# Altium PCB Single Channel Isolated Gate Driver Test Board Rev 2.PcbDoc
Units mm, origin at the board's own origin, x right, y up, seen from the top; angles counter-clockwise.
Board outline 58 x 46 mm, 4 copper layers (Top Layer, Power Layer, Ground Layer, Bottom Layer), stack 1.57 mm thick; 39 components, 17 nets, 84 pads, 15 vias.
Unrouted connection lines stored in the file: 2.
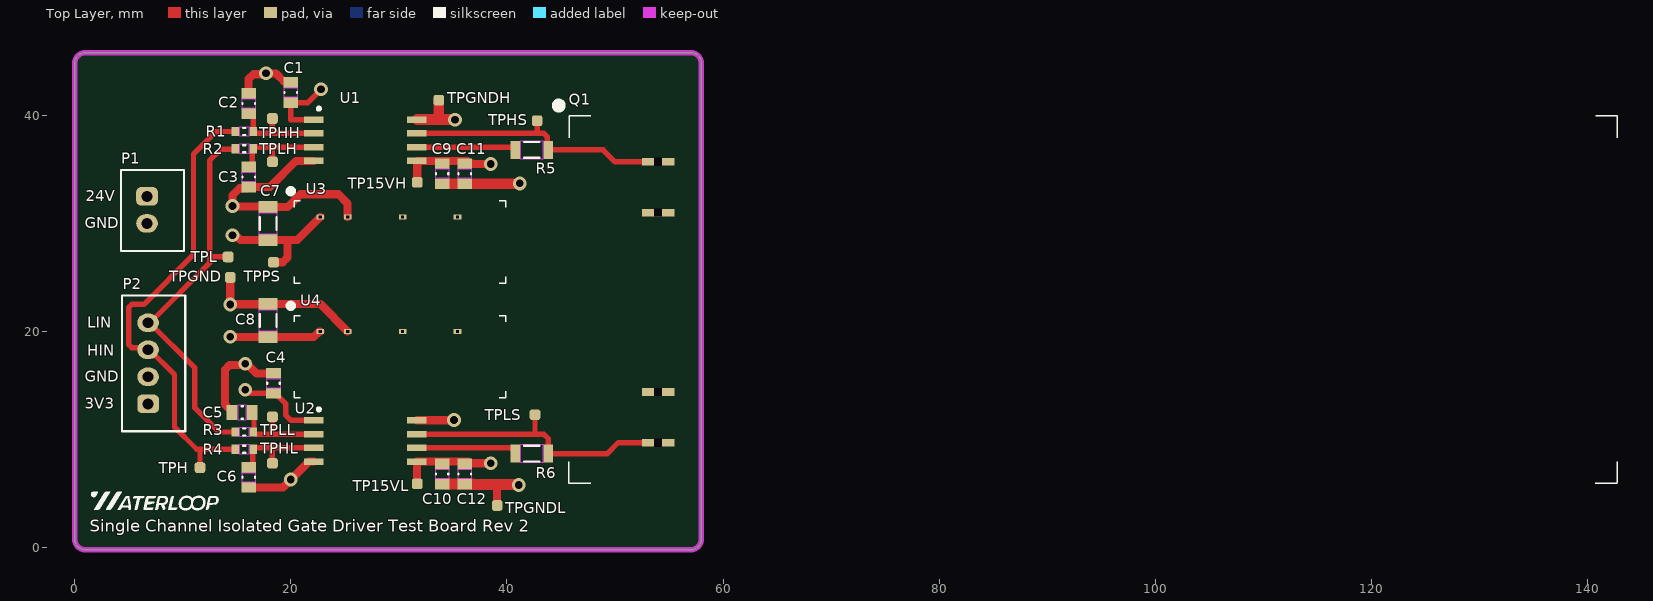
[diagram p0: Top Layer view]
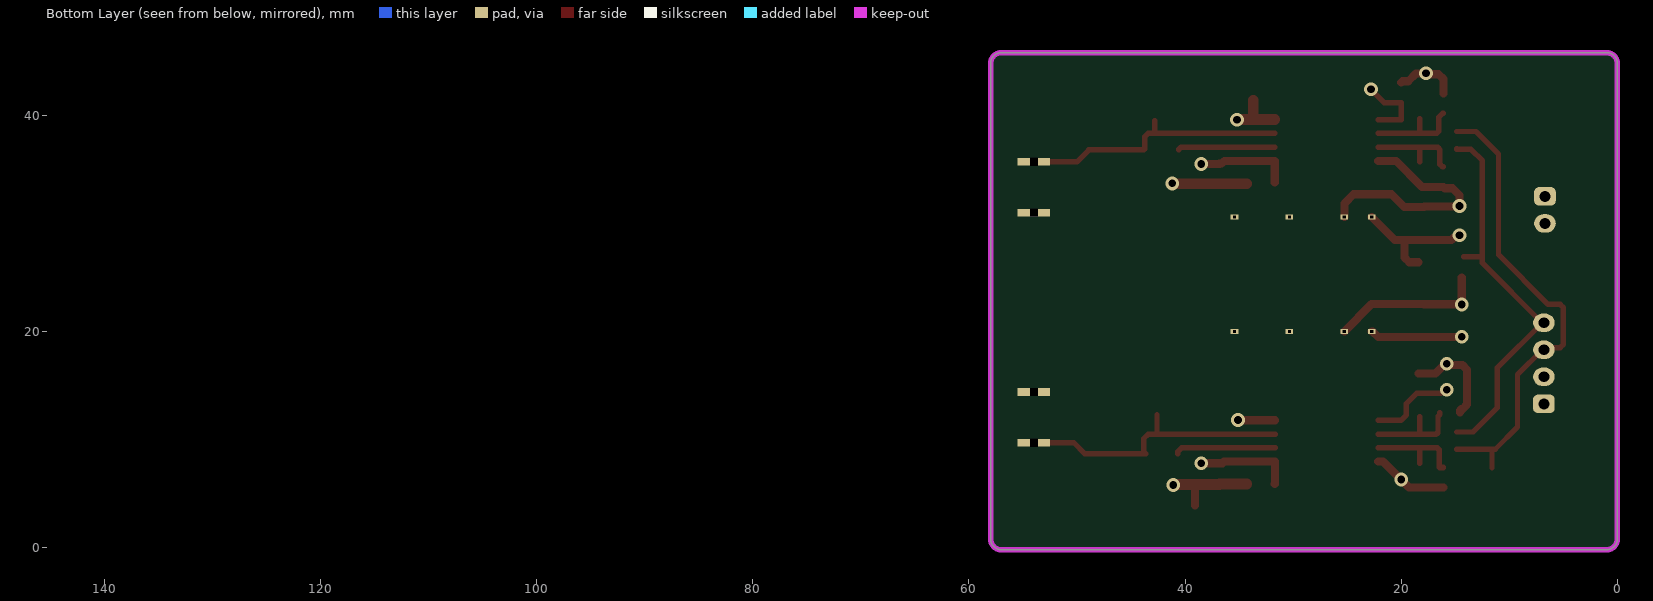
[diagram p1: Bottom Layer view, seen from below]
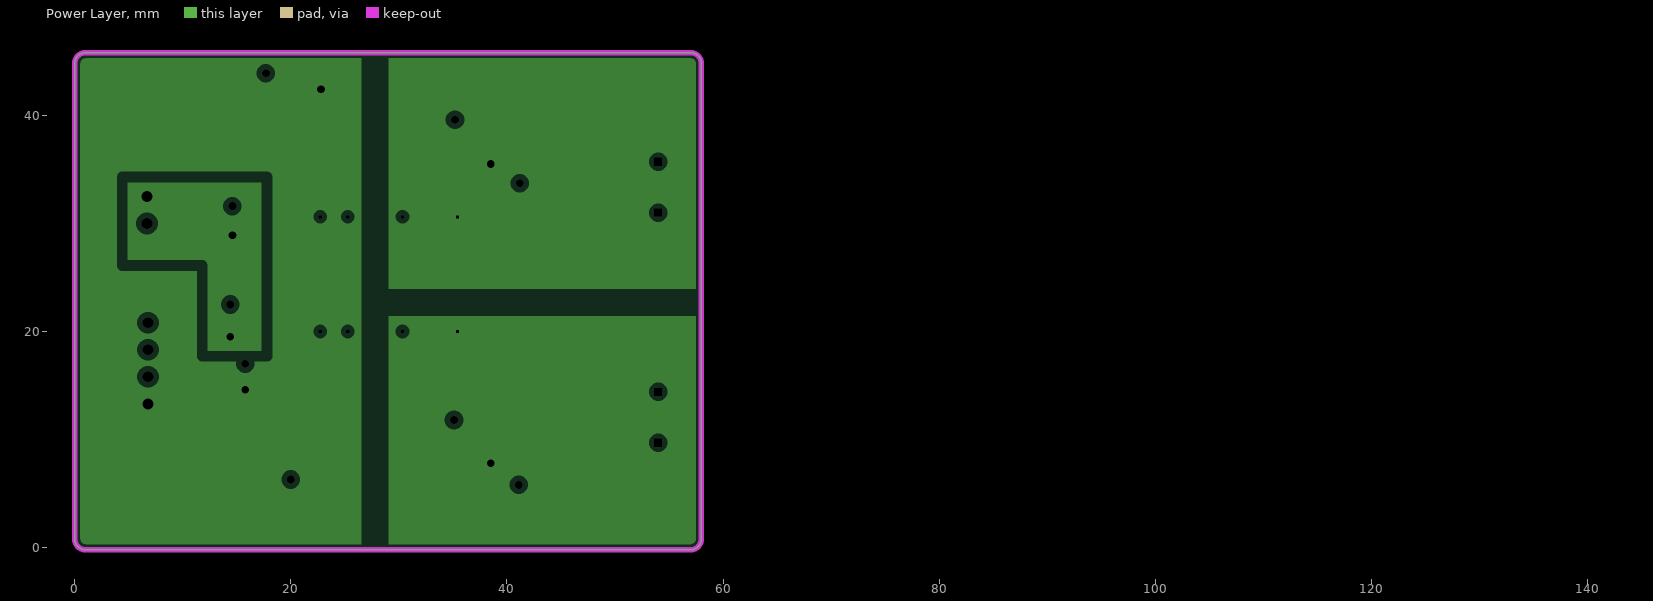
[diagram p2: Power Layer, clearances drawn from the general rule]
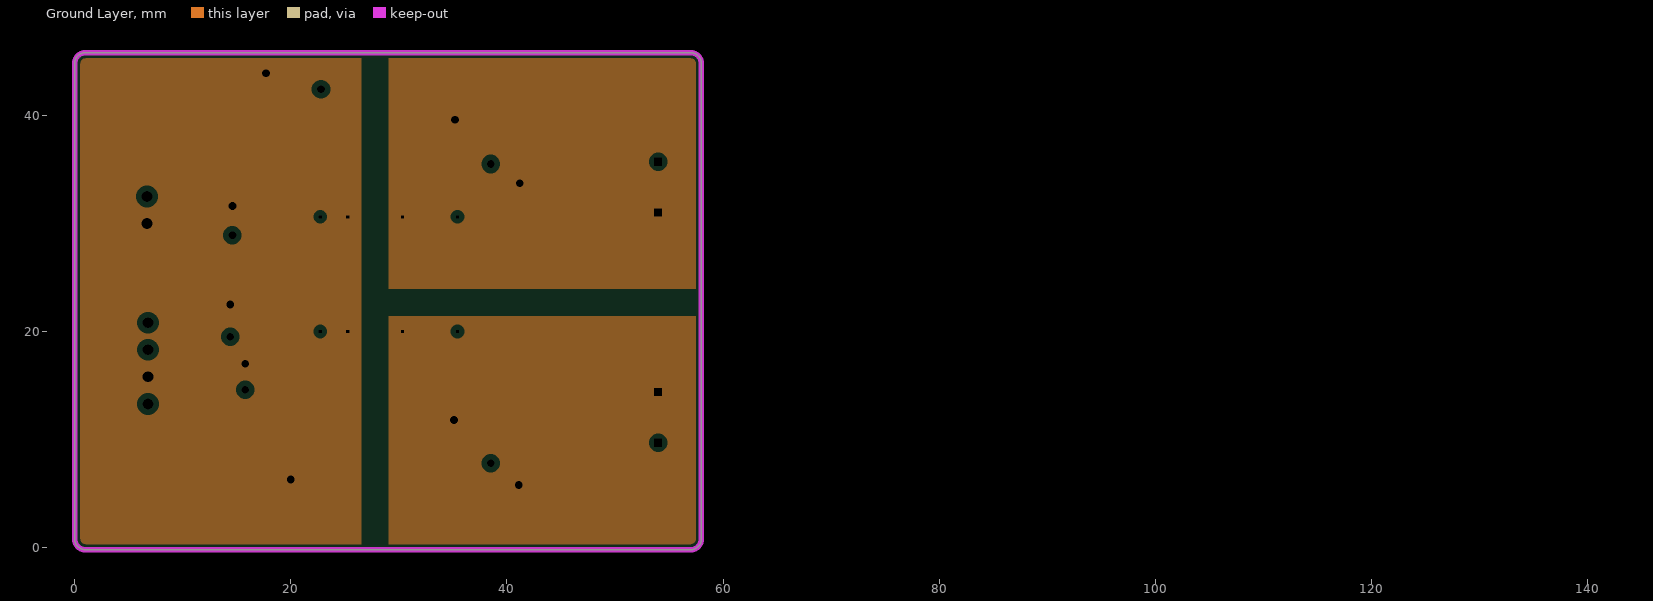
[diagram p3: Ground Layer, clearances drawn from the general rule]
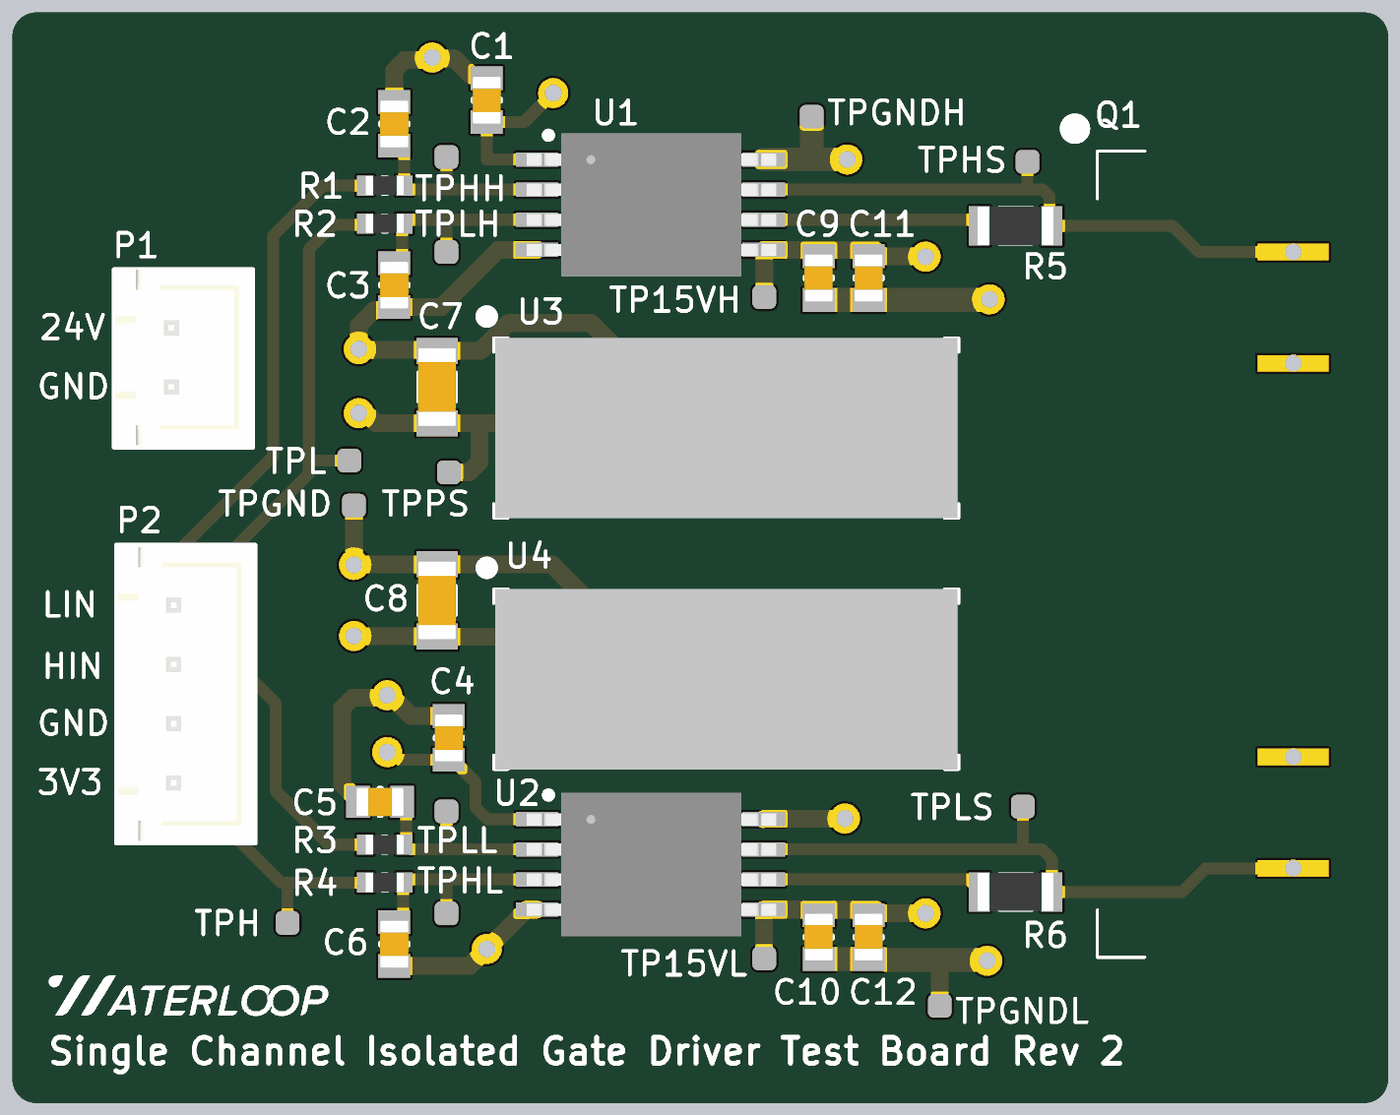
[diagram p4: 3D render of the assembled board from above, using the file's embedded part models]

## Layer stack, top to bottom
Top Solder: solder mask 0.0102, Solder Resist, Dk 3.5
Top Layer: signal copper 0.035
Dielectric 2: prepreg 0.2, FR-4, Dk 4.6
Power Layer: plane copper 0.0175, net (Multiple Nets)
Dielectric 1: dielectric 1.065, FR-4, Dk 4.6
Ground Layer: plane copper 0.0175, net (Multiple Nets)
Dielectric 3: prepreg 0.2, FR-4, Dk 4.6
Bottom Layer: signal copper 0.035
Bottom Solder: solder mask 0.0102, Solder Resist, Dk 3.5

## Board outline
0,0.8 0,44.8 cw(c1,44.8) 1,45.8 57,45.8 cw(c57,44.8) 58,44.8 58,0.8 cw(c57,0.8) 57,-0.2 1,-0.2 cw(c1,0.8)

## Design rules (kind name [scope] priority, off if disabled: settings)
Clearance [All] p1: gap=0.254 ignorepadtopadclearanceinfootprint=FALSE except(0: Arc-Hole Track-Hole SMDPad-Hole THPad-Hole Via-Hole Fill-Hole Poly-Hole Region-Hole Text-Hole)
PlaneClearance [All] p1: clearance=0.508
PlaneConnect [All] p1: planeconnectstyle=Relief reliefexpansion=0.508 reliefentries=4 reliefconductorwidth=0.254 reliefairgap=0.254
PolygonConnect [All] p1: connectstyle=Direct reliefconductorwidth=0.254 reliefentries=4 polygonreliefangle="90 Angle" airgapwidth=0.254
RoutingVias [All] p1: holewidth=0.711 width=1.27 viastyle="Through Hole" minholewidth=0.711 minwidth=1.27 maxholewidth=0.711 maxwidth=1.27
SolderMaskExpansion [All] p1: expansion=0.102 istentingtop=FALSE
Width [All] p1: maxlimit=2.54 minlimit=0.254 preferedwidth=0.508 minimp=50.000000 maximp=50.000000 favimp=50.000000
28 further rules are at their usual default settings.

## Components (designator, comment, footprint, x,y, rotation, side; value= is the part's Value field where it differs from the comment)
C1 "Capacitor - Nonpolarized" "0805 - Capacitor" 20,42.1 r90 top value="100 nF"
C2 "Capacitor - Nonpolarized" "0805 - Capacitor" 16.1,41.1 r270 top value="100 pF"
C3 "Capacitor - Nonpolarized" "0805 - Capacitor" 16.1,34.3 r90 top value="100 pF"
C4 "Capacitor - Nonpolarized" "0805 - Capacitor" 18.4,15.2 r90 top value="100 nF"
C5 "Capacitor - Nonpolarized" "0805 - Capacitor" 15.5,12.5 r0 top value="100 pF"
C6 "Capacitor - Nonpolarized" "0805 - Capacitor" 16.1,6.5 r90 top value="100 pF"
C7 "Capacitor - Nonpolarized" "1206 - Capacitor" 17.9,30 r270 top value="22 uF"
C8 "Capacitor - Nonpolarized" "1206 - Capacitor" 17.9,21 r270 top value="22 uF"
C9 "Capacitor - Nonpolarized" "0805 - Capacitor" 34,34.6 r90 top value="100 nF"
C10 "Capacitor - Nonpolarized" "0805 - Capacitor" 34,6.8 r90 top value="100 nF"
C11 "Capacitor - Nonpolarized" "0805 - Capacitor" 36.1,34.6 r90 top value="1 uF"
C12 "Capacitor - Nonpolarized" "0805 - Capacitor" 36.1,6.8 r90 top value="1 uF"
P1 "1x2 Header" B2B-XH 6.7,30 r90 top
P2 "1x4 Header" B4B-XH 6.8,13.3 r90 top
Q1 "FF50R12RT4" FF50R12RT4 47,5.7 r0 top
R1 "Resistor" "0603 - Resistor" 15.7,38.5 r0 top value=470
R2 "Resistor" "0603 - Resistor" 15.7,36.9 r0 top value=470
R3 "Resistor" "0603 - Resistor" 15.7,10.7 r0 top value=470
R4 "Resistor" "0603 - Resistor" 15.7,9.1 r0 top value=470
R5 "Resistor" "1206 - Resistor" 42.3,36.8 r0 top value=10
R6 "Resistor" "1206 - Resistor" 42.3,8.7 r0 top value=10
TP15VH "Test Point" "Test Point"#1 31.7,33.8 r90 top
TP15VL "Test Point" "Test Point"#1 31.7,5.9 r90 top
TPGND "Test Point" "Test Point"#1 14.4,25 r90 top
TPGNDH "Test Point" "Test Point"#2 31.4,36 r90 top
TPGNDL "Test Point" "Test Point"#1 39.1,3.9 r90 top
TPH "Test Point" "Test Point"#1 11.6,7.4 r90 top
TPHH "Test Point" "Test Point"#1 18.3,39.7 r90 top
TPHL "Test Point" "Test Point"#1 18.3,7.8 r90 top
TPHS "Test Point" "Test Point"#1 42.8,39.5 r90 top
TPL "Test Point" "Test Point"#1 14.2,26.9 r90 top
TPLH "Test Point" "Test Point"#1 18.3,35.7 r90 top
TPLL "Test Point" "Test Point"#1 18.3,12.1 r90 top
TPLS "Test Point" "Test Point"#1 42.6,12.3 r90 top
TPPS "Test Point" "Test Point"#1 18.4,26.4 r90 top
U1 "STGAP2HSCMTR" STGAP2HSCMTR 23.1,34.62 r0 top
U2 "STGAP2HSCMTR" STGAP2HSCMTR 23.1,6.79 r0 top
U3 "TBA 2-2413" "TBA 2-2413" 30.1,24.475 r0 top
U4 "TBA 2-2413" "TBA 2-2413" 30.1,13.875 r0 top

## Footprints (in the part's own frame and the unit in brackets; to place one, negate y for a bottom-side part, rotate by r counter-clockwise, add the part's x,y. Pads: shape width x height; smd on the part's side, far side on the other; paste and mask are expansions set on the pad)
"0603 - Resistor" [mm] "0603 Chip Resistor - IPC Medium Density"
  rect 0.7x0.85 smd: 1(-0.825,0) 2(0.825,0)
  Top Layer keep-out region: -0.45,0.4 -0.45,-0.4 0.45,-0.4 0.45,0.4
  silkscreen extent -0.1,-0.33 0.1,0.33, body extent -0.8,-0.4 0.8,0.4, height 0.45
"0805 - Capacitor" [mm] "0805 Chip Capacitor - IPC Medium Density"
  rect 1x1.35 smd: 1(-0.925,0) 2(0.925,0)
  Top Layer keep-out region: -0.4,0.65 -0.4,-0.65 0.4,-0.65 0.4,0.65
  silkscreen extent -0.05,-0.58 0.05,0.58, body extent -1,-0.6 1,0.6, height 1.2
"1206 - Capacitor" [mm] "1206 Chip Capacitor - IPC Medium Density"
  rect 1.1x1.75 smd: 1(-1.525,0) 2(1.525,0)
  Top Layer keep-out region: -0.95,0.85 -0.95,-0.85 0.95,-0.85 0.95,0.85
  silkscreen extent -0.6,-0.77 0.6,0.77, body extent -1.65,-0.8 1.65,0.8, height 1.6
"1206 - Resistor" [mm] "1206 Chip Resistor - IPC Medium Density"
  rect 0.9x1.65 smd: 1(-1.525,0) 2(1.525,0)
  Top Layer keep-out region: -1.05,0.8 -1.05,-0.8 1.05,-0.8 1.05,0.8
  silkscreen extent -0.7,-0.72 0.7,0.72, body extent -1.6,-0.8 1.6,0.8, height 0.55
B2B-XH [mm] "JST 2-pin Header"
  oval 1.7x2 hole 1: 1(0,0)
  rrect50% 1.7x2 hole 1: 2(2.5,0)
  silkscreen extent -2.54,-3.43 4.95,2.41, body extent -2.45,-3.4 4.95,2.35, height 7
B4B-XH [mm] "JST 4-Pin"
  rrect50% 1.7x2 hole 1: 1(0,0)
  oval 1.7x2 hole 1: 2(2.5,0) 3(5,0) 4(7.5,0)
  silkscreen extent -2.54,-3.43 10.03,2.41, body extent -2.45,-3.4 9.95,2.35, height 7
FF50R12RT4 [mm] "Emitter Controlled 4 Diode"
  rect 3x0.7 hole 0.7 square: 4(7,30) 5(7,25.3) 6(7,4) 7(7,8.7)
  silkscreen extent -2.34,0.25 95.75,35.34
STGAP2HSCMTR [mm] "Galvanically Isolated 4A Single Gate Driver"
  rect 1.8x0.6 smd: 1(-0.978,4.98) 2(-0.978,3.71) 3(-0.978,2.44) 4(-0.978,1.17) 5(8.572,1.17) 6(8.572,2.44) 7(8.572,3.71) 8(8.572,4.98)
  silkscreen extent -0.58,5.92 -0.42,6.08, body extent -1.42,0.04 9.1,6.09, height 2.64
"TBA 2-2413" [mm] "DC DC CONVERTER 15V 2W"
  rect 0.7x0.45 hole 0.25 square: 1(-7.375,6.125) 2(-4.835,6.125) 4(0.246,6.125) 6(5.325,6.125)
  silkscreen extent -10.32,0 9.8,8.72, body extent -9.75,0 9.75,7.6, height 10.24
"Test Point"#1 [mm] "Test Point"
  rrect50% 1x1 smd: 1(0,0)
"Test Point"#2 [mm] "Test Point"
  rrect50% 1x1 smd: 1(5.4,-2.3)

## Part data
C1 C4 C9 C10: "Nonpolarized Capacitor", Manufacturer=YAGEO, Manufacturer Part Number=CC0805KRX7R9BB104, Rating="50 V", Supplier Part Number=311-1140-1-ND, Supplier=DigiKey
C2 C3 C5 C6: "Nonpolarized Capacitor", Manufacturer=YAGEO, Manufacturer Part Number=CC0805JRNPO9BN101, Rating="50 V", Supplier Part Number=311-1111-1-ND, Supplier=DigiKey
C7: "Nonpolarized Capacitor", Manufacturer="Samsung Elctro-Mechanics", Manufacturer Part Number=CL31A226KAHNNNE, Rating="25 V", Supplier Part Number=1276-3047-1-ND, Supplier=DigiKey
C8: "Nonpolarized Capacitor", Manufacturer="Samsung Electro-Mechanics", Manufacturer Part Number=CL31A226KAHNNNE, Rating="25 V", Supplier Part Number=1276-3047-1-ND, Supplier=DigiKey
C11 C12: "Nonpolarized Capacitor", Manufacturer=YAGEO, Manufacturer Part Number=CC0805MKY5V9BB105, Rating="50 V", Supplier Part Number=311-3435-1-ND, Supplier=DigiKey
P1: "1x2 Pin Header"
P2: "1x4 Pin Header"
Q1: "IGBT-Module Gate Driver Header", Manufacturer="Infineon Technologies", Manufacturer Part Number=FF50R12RT4HOSA1, Supplier Part Number=FF50R12RT4HOSA1-ND, Supplier=DigiKey
R1 R2 R3 R4: Manufacturer=YAGEO, Manufacturer Part Number=RC0603FR-07470RL, Rating="0.1 W", Supplier Part Number=311-470HRCT-ND, Supplier=DigiKey
R5 R6: Manufacturer="Stackpole Electronics", Manufacturer Part Number=RMCF1206FT10R0, Rating="0.25 W", Supplier Part Number=RMCF1206FT10R0CT-ND, Supplier=DigiKey
U1 U2: "Isolated Gate Driver 4A Sink/Source", Manufacturer=STMicroelectronics, Supplier Part Number=497-STGAP2HSCMCT-ND, Manufacturer Part Number=STGAP2HSCMTR, Supplier=DigiKey
U3 U4: "DC DC CONVERTER 15V 2W", Manufacturer="Traco Power", Supplier Part Number=1951-3443-ND, Manufacturer Part Number="TBA 2-2413", Supplier=DigiKey

## Via types
v1: diameter 1.27, hole 0.711, Top Layer to Bottom Layer, 15 vias

## Nets (pads, with @x,y where several pads share a name; then routed paths per layer and width w, separated by ;. In a path a pad name is that pad's centre, name@x,y a point inside that pad or via, vN(x,y) a via of type N, cw(c..) or ccw(c..) an arc to the next point about the centre after c; other vN are vias at no path point)
3V3: C1.1 C4.1 P2.1 U1.1 U2.1 | length 15.1
  Top Layer w0.5: v1(15.8,14.6) 16.008,14.6 16.333,14.275 18.575,14.275 19.532,13.318 19.532,12.268 20.03,11.77 U2.1 ; U1.1 20,39.6 C1.1 21.575,41.175 v1(22.8,42.4)
15V_HS: C9.2 C11.2 TP15VH.1 U1.5 U3.6 | length 9
  Top Layer w0.75: TP15VH.1 31.7,35.79 34,35.79 36.36,35.79 36.625,35.525 36.8,35.525 36.812,35.512 38.36,35.512 38.372,35.5 v1@38.6,35.5
  other v1: 38.5,35.5
15V_LS: C10.2 C12.2 TP15VL.1 U2.5 U4.6 | length 9
  Top Layer w0.75: TP15VL.1 31.686,5.914 31.686,7.946 U2.5 34,7.96 36.39,7.96 36.55,7.8 v1(38.5,7.8)
24V: C7.2 C8.2 P1.2 TPPS.1 U3.1 U4.1 | length 20.9
  Top Layer w0.75: v1(14.4,19.5) 14.412,19.488 17.888,19.488 C8.2 22.125,19.475 22.65,20 U4.1 ; v1(14.6,28.9) 14.747,28.753 15.056,28.753 15.334,28.475 C7.2 19.7,28.475 ; TPPS.1 19.261,26.4 19.7,26.839 19.7,28.475 ; U3.1 20.6,28.475 19.7,28.475
GHS: Q1.4 R5.2 TPHS.1 U1.7 | length 25.1
  Top Layer w0.5: U1.7@31.7,38.33 42.8,38.33 ; TPHS.1 42.8,38.33 ; R5.2 43.726,36.899 43.726,38.037 43.434,38.33 42.8,38.33 ; R5.2@44,36.8 48.9,36.8 50,35.7 Q1.4
GLS: Q1.6 R6.2 TPLS.1 U2.7 | length 26.3
  Top Layer w0.5: U2.7 42.6,10.5 ; TPLS.1 42.6,10.5 ; R6.2@43.625,8.7 49.3,8.7 50.3,9.7 Q1.6 ; R6.2 43.825,10.075 43.4,10.5 42.6,10.5
GND: C1.2 C2.1 C3.1 C4.2 C5.1 C6.1 C7.1 C8.1 P1.1 P2.2 TPGND.1 U1.4 U2.4 U3.2 U4.2 | length 59.3
  Top Layer w0.75: TPGND.1 v1(14.4,22.5) 14.413,22.513 17.888,22.513 C8.1 22.74,22.525 U4.2 ; C5.1 14.575,12.675 14.45,12.8 14.339,12.8 13.9,13.239 13.9,16.461 14.339,16.901 15.701,16.901 v1(15.8,17) 15.941,17 16.816,16.125 C4.2 ; C6.1 19.276,5.575 v1(20,6.3) 20.012,6.3 21.672,7.96 U2.4 ; C2.1 16.1,43.361 16.539,43.801 17.601,43.801 v1(17.7,43.9) 17.745,43.855 18.645,43.855 19.35,43.15 19.875,43.15 C1.2 ; U1.4 20.49,35.79 18.075,33.375 C3.1 15.975,33.25 15.25,33.25 14.6,32.6 v1(14.6,31.6) 14.637,31.562 17.863,31.562 C7.1 19.725,31.525 20.9,32.7 24.4,32.7 25.265,31.835 U3.2
GND_HS: C9.1 C11.1 Q1.5 TPGNDH.1 U1.8 U3.4 | length 12.2
  Top Layer w1: U1.8@31.7,39.6 33.7,39.6 ; TPGNDH.1 33.7,39.6 ; C9.1@34.3,33.675 41.175,33.675 v1(41.2,33.7) ; v1(35.2,39.6) 33.7,39.6
GND_LS: C10.1 C12.1 Q1.7 TPGNDL.1 U2.8 U4.4 | length 12.2
  Top Layer w0.75: U2.8 31.688,11.785 35.085,11.785 v1(35.1,11.8) ; TPGNDL.1 39.1,5.837
  Top Layer w1: C10.1@34.3,5.875 36.8,5.875 36.838,5.837 39.1,5.837 41.062,5.837 v1(41.1,5.8)
HIN: P2.3 R1.1 R4.1 TPH.1 | length 43.9
  Top Layer w0.5: TPH.1 11.6,9.1 ; R4.1 11.6,9.1 ; R1.1 13.1,38.5 11,36.4 11,27.1 6.4,22.5 5.293,22.5 5,22.207 5,18.799 5.293,18.506 6.594,18.506 P2.3 6.95,18.3 9.24,16.01 9.24,11.16 11.3,9.1 11.6,9.1
LIN: P2.4 R2.1 R3.1 TPL.1 | length 36.3
  Top Layer w0.5: P2.4 P2.4@6.95,20.8 ; TPL.1 12.5,26.9 ; R3.1 13.35,10.7 11.1,12.95 11.1,16.65 P2.4@6.95,20.8 ; R2.1 14.875,36.875 14.85,36.85 13.55,36.85 12.5,35.8 12.5,26.9 ; P2.4@6.95,20.8 12.5,26.35 12.5,26.9
NetC2_2: C2.2 R1.2 TPHH.1 U1.2 | length 8.9
  Top Layer w0.5: C2.2 16.175,40.175 16.525,39.825 R1.2 R1.2@16.538,38.5 ; R1.2@16.538,38.512 16.72,38.33 18.3,38.33 ; TPHH.1 18.3,38.33 ; U1.2 18.3,38.33
NetC3_2: C3.2 R2.2 TPLH.1 U1.3 | length 8.9
  Top Layer w0.5: C3.2 16.175,35.225 16.425,35.475 16.425,36.8 R2.2 ; R2.2@16.525,36.96 16.625,37.06 18.3,37.06 ; TPLH.1 18.3,37.06 ; U1.3 18.3,37.06
NetC5_2: C5.2 R3.2 TPLL.1 U2.2 | length 9.1
  Top Layer w0.5: C5.2 16.425,12.325 16.6,12.15 R3.2@16.6,10.75 ; R3.2@16.6,10.7 16.6,10.625 16.7,10.525 16.775,10.525 16.8,10.5 18.3,10.5 ; TPLL.1 18.3,10.5 ; U2.2 18.3,10.5
NetC6_2: C6.2 R4.2 TPHL.1 U2.3 | length 9.2
  Top Layer w0.5: C6.2 16.125,7.4 16.425,7.4 16.475,7.45 16.475,9.05 R4.2 16.537,9.088 16.68,9.23 18.3,9.23 ; TPHL.1 18.3,9.23 ; U2.3 18.3,9.23
NetR5_1: R5.1 U1.6 | length 9
  Top Layer w0.5: U1.6@31.7,37.06 40.375,37.06 40.575,36.86 R5.1@40.575,36.8
NetR6_1: R6.1 U2.6 | length 9.3
  Top Layer w0.5: U2.6 40.32,9.23 40.675,8.875 R6.1@40.675,8.7

## Polygon pours and split planes (outlines as drawn)
3V3 on Power Layer (split plane): 1,45.29 26.548,45.29 26.548,0.31 1,0.31 0.988,0.309 0.904,0.318 0.812,0.346 0.727,0.391 0.652,0.452 0.591,0.527 0.546,0.612 0.518,0.704 0.509,0.788 0.51,0.8 0.51,44.8 0.509,44.812 0.518,44.896 0.546,44.988 0.591,45.073 0.652,45.148 0.727,45.209 0.812,45.254 0.904,45.282 0.988,45.291
24V on Power Layer (split plane): 17.298,18.202 12.302,18.202 12.302,26.1 12.293,26.198 12.264,26.292 12.218,26.379 12.155,26.455 12.079,26.518 11.992,26.564 11.898,26.593 11.8,26.602 4.902,26.602 4.902,33.798 17.298,33.798
15V_LS on Power Layer (split plane): 57.49,0.8 57.491,0.788 57.482,0.704 57.454,0.612 57.409,0.527 57.348,0.452 57.273,0.391 57.188,0.346 57.096,0.318 57.012,0.309 57,0.31 29.052,0.31 29.052,21.448 57.49,21.448
15V_HS on Power Layer (split plane): 57.096,45.282 57.188,45.254 57.273,45.209 57.348,45.148 57.409,45.073 57.454,44.988 57.482,44.896 57.491,44.812 57.49,44.8 57.49,23.952 29.052,23.952 29.052,45.29 57,45.29 57.012,45.291
GND on Ground Layer (split plane): 1,45.29 26.548,45.29 26.548,0.5 26.556,0.36 26.564,0.31 1,0.31 0.988,0.309 0.904,0.318 0.812,0.346 0.727,0.391 0.652,0.452 0.591,0.527 0.546,0.612 0.518,0.704 0.509,0.788 0.51,0.8 0.51,44.8 0.509,44.812 0.518,44.896 0.546,44.988 0.591,45.073 0.652,45.148 0.727,45.209 0.812,45.254 0.904,45.282 0.988,45.291
GND_LS on Ground Layer (split plane): 57.49,0.8 57.491,0.788 57.482,0.704 57.454,0.612 57.409,0.527 57.348,0.452 57.273,0.391 57.188,0.346 57.096,0.318 57.012,0.309 57,0.31 29.036,0.31 29.044,0.36 29.052,0.5 29.052,21.448 57.49,21.448
GND_HS on Ground Layer (split plane): 57.096,45.282 57.188,45.254 57.273,45.209 57.348,45.148 57.409,45.073 57.454,44.988 57.482,44.896 57.491,44.812 57.49,44.8 57.49,23.952 29.052,23.952 29.052,45.29 57,45.29 57.012,45.291

## Keep-outs
Keep-Out Layer:
  the board outline again, w0.5

## Other copper
Power Layer (plane layer: these items are gaps in the copper):
  lines w1: 4.4,26.1 4.4,34.3 17.8,34.3 17.8,17.7 11.8,17.7 11.8,26.1 4.4,26.1
  lines w2.5: 27.8,0.3 27.8,45.3 ; 28.2,22.7 57.5,22.7
Ground Layer (plane layer: these items are gaps in the copper):
  lines w2.5: 27.8,0.5 27.8,45.3 ; 27.8,22.7 57.5,22.7

## Silkscreen, mask and mechanical layers (free items; w line width, h text height)
Top Overlay:
  drawing of 10 lines, arcs and shapes, not listed
  text "24V" at 1.05,32.05 h1
  text "GND" at 0.95,29.55 h1
  text "LIN" at 1.15,20.35 h1
  text "HIN" at 1.15,17.75 h1
  text "GND" at 0.95,15.35 h1
  text "3V3" at 0.95,12.85 h1
  text "Single Channel Isolated Gate Driver Test Board Rev 2" at 1.4,1.467 h1.1